# EAGLE board SparkFun_Si7021_Breakout_Panel_v10 (EAGLE 7.5.0), part 1 of 4
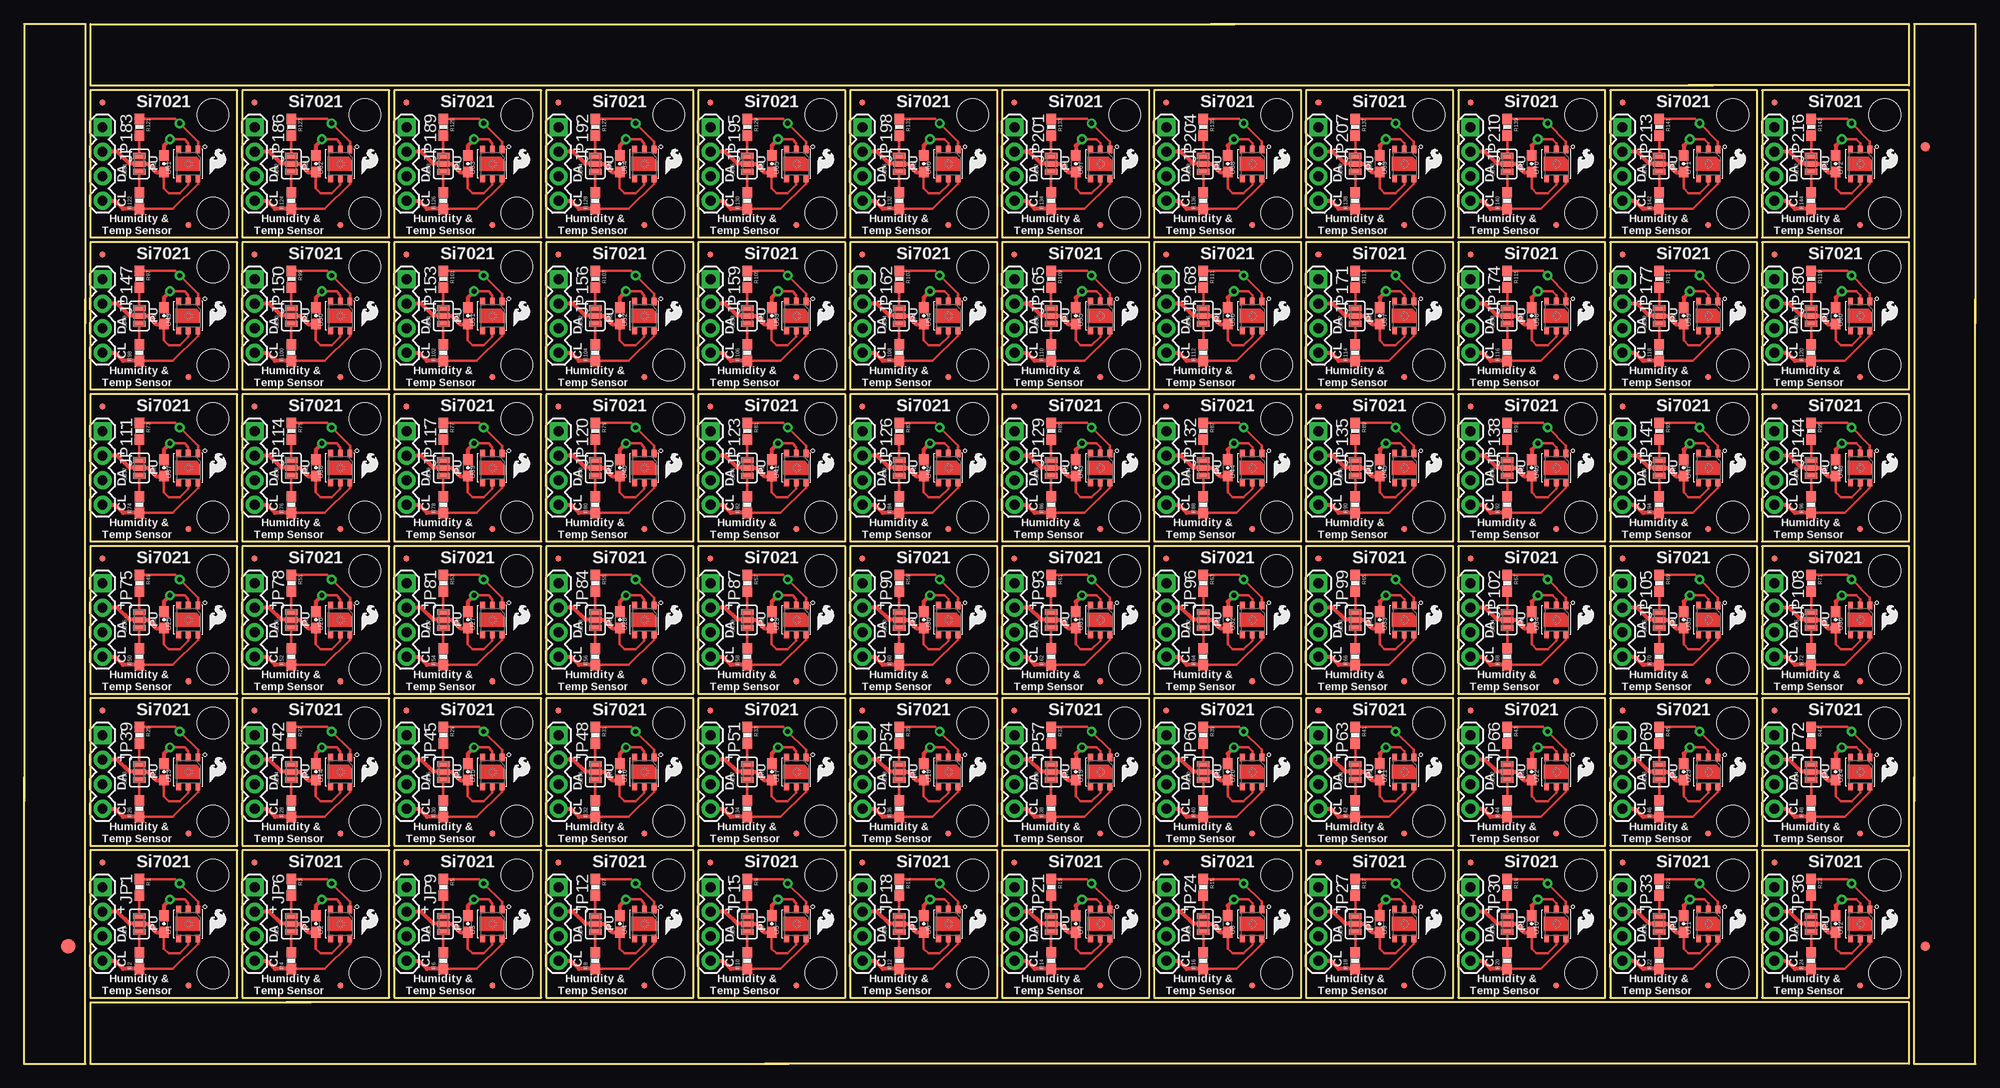
[diagram p0: board, top side]
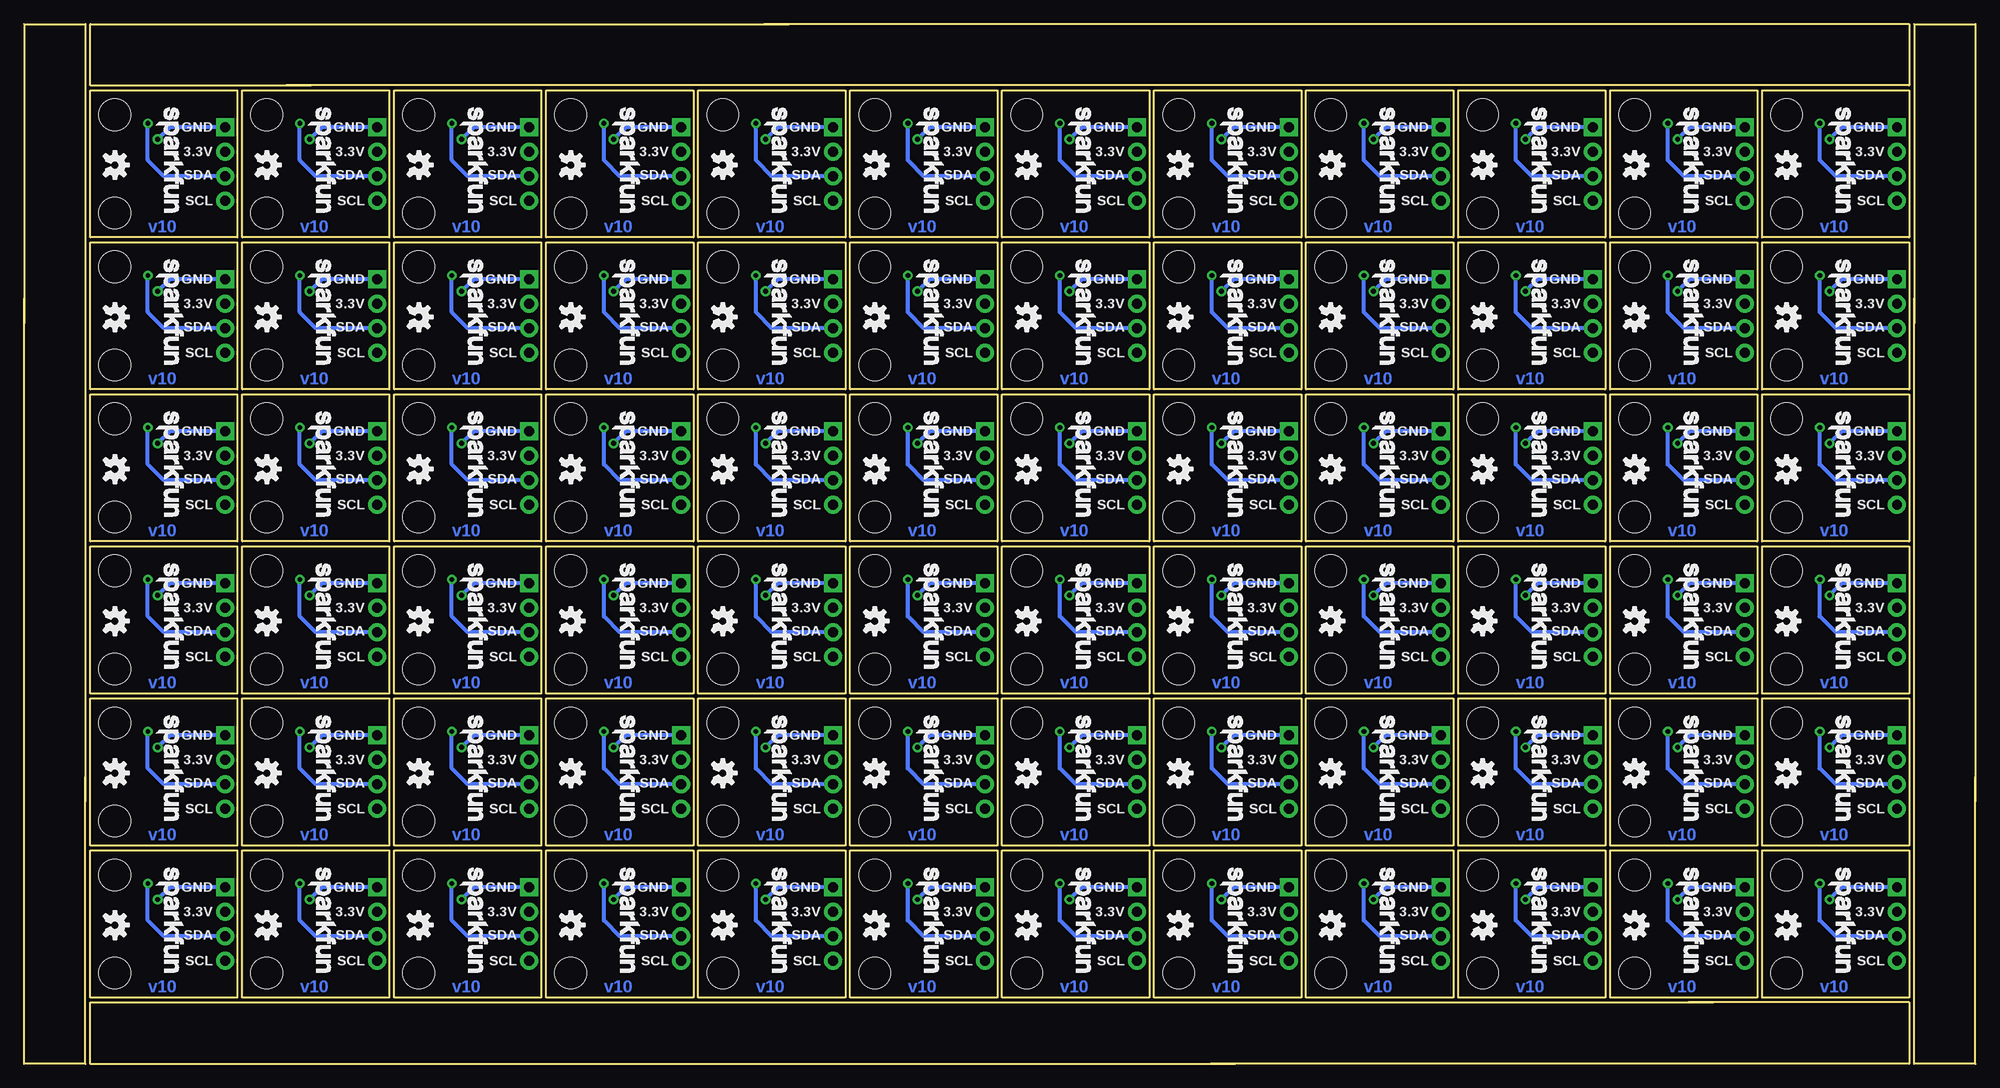
[diagram p1: board, bottom side, seen from below]

Size 202.18 x 107.7 mm. Coordinates in mm from the lower left corner, seen from the top.
Outline: 312 segments
Copper layers (1*16): Top 0.035mm / dielectric 1.5mm / Bottom 0.035mm
Design rules "SparkFun": minimum track width 8mil, minimum drill 20mil, track to track 8mil, track to pad 8mil, pad to pad 8mil, via to via 8mil, smd to smd 8mil, copper to edge 10mil, drill to drill 8mil, minimum pad ring 12mil, minimum via ring 10mil, stop-mask expansion 4mil, vias tented up to drill 25mil, thermal gap 10mil

## Footprints (pad centres in the part's own frame; a part is rotated, then mirrored left to right if it is on the bottom)
0603-CAP = smd 1.1 x 1: 1 -0.85,0; 2 0.85,0
FIDUCIAL-1.5X3 = smd 1.5 x 1.5: 1 0,0
FIDUCIAL-1X2 = smd 1 x 1: 1 0,0
1X04 = drill 1.016 pad 1.88 square: 1 0,0 | drill 1.016 pad 1.88: 2 2.54,0; 3 5.08,0; 4 7.62,0
MICRO-FIDUCIAL = smd 0.635 x 0.635: 1 0,0
0603-RES = smd 1.1 x 1: 1 -0.85,0; 2 0.85,0
SJ_3_PASTE1&2&3 = smd 0.635 x 1.27: 1 -0.813,0; 2 0,0; 3 0.813,0
STAND-OFF = hole 3.302: 0,0
SI7021 = smd 0.8 x 0.5: DATA 1.5,-1; GND 1.5,0; NC@3 1.5,1; NC@4 -1.5,1; SCK -1.5,-1; VDD -1.5,0

## Placement (x,y rotation side)
C1  0.1uF  [0603-CAP]  30.23,14.48 90 top
C2  0.1uF  [0603-CAP]  14.48,14.48 90 top
C3  0.1uF  [0603-CAP]  45.97,14.48 90 top
C4  0.1uF  [0603-CAP]  61.72,14.48 90 top
C5  0.1uF  [0603-CAP]  77.47,14.48 90 top
C6  0.1uF  [0603-CAP]  93.22,14.48 90 top
C7  0.1uF  [0603-CAP]  108.97,14.48 90 top
C8  0.1uF  [0603-CAP]  124.71,14.48 90 top
C9  0.1uF  [0603-CAP]  140.46,14.48 90 top
C10  0.1uF  [0603-CAP]  156.21,14.48 90 top
C11  0.1uF  [0603-CAP]  171.96,14.48 90 top
C12  0.1uF  [0603-CAP]  187.71,14.48 90 top
C13  0.1uF  [0603-CAP]  14.48,30.23 90 top
C14  0.1uF  [0603-CAP]  30.23,30.23 90 top
C15  0.1uF  [0603-CAP]  45.97,30.23 90 top
C16  0.1uF  [0603-CAP]  61.72,30.23 90 top
C17  0.1uF  [0603-CAP]  77.47,30.23 90 top
C18  0.1uF  [0603-CAP]  93.22,30.23 90 top
C19  0.1uF  [0603-CAP]  108.97,30.23 90 top
C20  0.1uF  [0603-CAP]  124.71,30.23 90 top
C21  0.1uF  [0603-CAP]  140.46,30.23 90 top
C22  0.1uF  [0603-CAP]  156.21,30.23 90 top
C23  0.1uF  [0603-CAP]  171.96,30.23 90 top
C24  0.1uF  [0603-CAP]  187.71,30.23 90 top
C25  0.1uF  [0603-CAP]  14.48,45.97 90 top
C26  0.1uF  [0603-CAP]  30.23,45.97 90 top
C27  0.1uF  [0603-CAP]  45.97,45.97 90 top
C28  0.1uF  [0603-CAP]  61.72,45.97 90 top
C29  0.1uF  [0603-CAP]  77.47,45.97 90 top
C30  0.1uF  [0603-CAP]  93.22,45.97 90 top
C31  0.1uF  [0603-CAP]  108.97,45.97 90 top
C32  0.1uF  [0603-CAP]  124.71,45.97 90 top
C33  0.1uF  [0603-CAP]  140.46,45.97 90 top
C34  0.1uF  [0603-CAP]  156.21,45.97 90 top
C35  0.1uF  [0603-CAP]  171.96,45.97 90 top
C36  0.1uF  [0603-CAP]  187.71,45.97 90 top
C37  0.1uF  [0603-CAP]  14.48,61.72 90 top
C38  0.1uF  [0603-CAP]  30.23,61.72 90 top
C39  0.1uF  [0603-CAP]  45.97,61.72 90 top
C40  0.1uF  [0603-CAP]  61.72,61.72 90 top
C41  0.1uF  [0603-CAP]  77.47,61.72 90 top
C42  0.1uF  [0603-CAP]  93.22,61.72 90 top
C43  0.1uF  [0603-CAP]  108.97,61.72 90 top
C44  0.1uF  [0603-CAP]  124.71,61.72 90 top
C45  0.1uF  [0603-CAP]  140.46,61.72 90 top
C46  0.1uF  [0603-CAP]  156.21,61.72 90 top
C47  0.1uF  [0603-CAP]  171.96,61.72 90 top
C48  0.1uF  [0603-CAP]  187.71,61.72 90 top
C49  0.1uF  [0603-CAP]  14.48,77.47 90 top
C50  0.1uF  [0603-CAP]  30.23,77.47 90 top
C51  0.1uF  [0603-CAP]  45.97,77.47 90 top
C52  0.1uF  [0603-CAP]  61.72,77.47 90 top
C53  0.1uF  [0603-CAP]  77.47,77.47 90 top
C54  0.1uF  [0603-CAP]  93.22,77.47 90 top
C55  0.1uF  [0603-CAP]  108.97,77.47 90 top
C56  0.1uF  [0603-CAP]  124.71,77.47 90 top
C57  0.1uF  [0603-CAP]  140.46,77.47 90 top
C58  0.1uF  [0603-CAP]  156.21,77.47 90 top
C59  0.1uF  [0603-CAP]  171.96,77.47 90 top
C60  0.1uF  [0603-CAP]  187.71,77.47 90 top
C61  0.1uF  [0603-CAP]  14.48,93.22 90 top
C62  0.1uF  [0603-CAP]  30.23,93.22 90 top
C63  0.1uF  [0603-CAP]  45.97,93.22 90 top
C64  0.1uF  [0603-CAP]  61.72,93.22 90 top
C65  0.1uF  [0603-CAP]  77.47,93.22 90 top
C66  0.1uF  [0603-CAP]  93.22,93.22 90 top
C67  0.1uF  [0603-CAP]  108.97,93.22 90 top
C68  0.1uF  [0603-CAP]  124.71,93.22 90 top
C69  0.1uF  [0603-CAP]  140.46,93.22 90 top
C70  0.1uF  [0603-CAP]  156.21,93.22 90 top
C71  0.1uF  [0603-CAP]  171.96,93.22 90 top
C72  0.1uF  [0603-CAP]  187.71,93.22 90 top
E$1  [FIDUCIAL-1.5X3]  4.57,12.19 0 top
E$5  [FIDUCIAL-1X2]  196.98,12.19 0 top
E$6  [FIDUCIAL-1X2]  196.98,95 180 top
JP1  [1X04]  8.13,18.29 270 top
JP2  FIDUCIALUFIDUCIAL  [MICRO-FIDUCIAL]  32.77,8.13 90 top
JP3  FIDUCIALUFIDUCIAL  [MICRO-FIDUCIAL]  17.02,8.13 90 top
JP4  FIDUCIALUFIDUCIAL  [MICRO-FIDUCIAL]  8.13,20.83 90 top
JP5  FIDUCIALUFIDUCIAL  [MICRO-FIDUCIAL]  23.88,20.83 90 top
JP6  [1X04]  23.88,18.29 270 top
JP7  FIDUCIALUFIDUCIAL  [MICRO-FIDUCIAL]  48.51,8.13 90 top
JP8  FIDUCIALUFIDUCIAL  [MICRO-FIDUCIAL]  39.62,20.83 90 top
JP9  [1X04]  39.62,18.29 270 top
JP10  FIDUCIALUFIDUCIAL  [MICRO-FIDUCIAL]  64.26,8.13 90 top
JP11  FIDUCIALUFIDUCIAL  [MICRO-FIDUCIAL]  55.37,20.83 90 top
JP12  [1X04]  55.37,18.29 270 top
JP13  FIDUCIALUFIDUCIAL  [MICRO-FIDUCIAL]  80.01,8.13 90 top
JP14  FIDUCIALUFIDUCIAL  [MICRO-FIDUCIAL]  71.12,20.83 90 top
JP15  [1X04]  71.12,18.29 270 top
JP16  FIDUCIALUFIDUCIAL  [MICRO-FIDUCIAL]  95.76,8.13 90 top
JP17  FIDUCIALUFIDUCIAL  [MICRO-FIDUCIAL]  86.87,20.83 90 top
JP18  [1X04]  86.87,18.29 270 top
JP19  FIDUCIALUFIDUCIAL  [MICRO-FIDUCIAL]  111.51,8.13 90 top
JP20  FIDUCIALUFIDUCIAL  [MICRO-FIDUCIAL]  102.62,20.83 90 top
JP21  [1X04]  102.62,18.29 270 top
JP22  FIDUCIALUFIDUCIAL  [MICRO-FIDUCIAL]  127.25,8.13 90 top
JP23  FIDUCIALUFIDUCIAL  [MICRO-FIDUCIAL]  118.36,20.83 90 top
JP24  [1X04]  118.36,18.29 270 top
JP25  FIDUCIALUFIDUCIAL  [MICRO-FIDUCIAL]  143,8.13 90 top
JP26  FIDUCIALUFIDUCIAL  [MICRO-FIDUCIAL]  134.11,20.83 90 top
JP27  [1X04]  134.11,18.29 270 top
JP28  FIDUCIALUFIDUCIAL  [MICRO-FIDUCIAL]  158.75,8.13 90 top
JP29  FIDUCIALUFIDUCIAL  [MICRO-FIDUCIAL]  149.86,20.83 90 top
JP30  [1X04]  149.86,18.29 270 top
JP31  FIDUCIALUFIDUCIAL  [MICRO-FIDUCIAL]  174.5,8.13 90 top
JP32  FIDUCIALUFIDUCIAL  [MICRO-FIDUCIAL]  165.61,20.83 90 top
JP33  [1X04]  165.61,18.29 270 top
JP34  FIDUCIALUFIDUCIAL  [MICRO-FIDUCIAL]  190.25,8.13 90 top
JP35  FIDUCIALUFIDUCIAL  [MICRO-FIDUCIAL]  181.36,20.83 90 top
JP36  [1X04]  181.36,18.29 270 top
JP37  FIDUCIALUFIDUCIAL  [MICRO-FIDUCIAL]  17.02,23.88 90 top
JP38  FIDUCIALUFIDUCIAL  [MICRO-FIDUCIAL]  8.13,36.58 90 top
JP39  [1X04]  8.13,34.04 270 top
JP40  FIDUCIALUFIDUCIAL  [MICRO-FIDUCIAL]  32.77,23.88 90 top
JP41  FIDUCIALUFIDUCIAL  [MICRO-FIDUCIAL]  23.88,36.58 90 top
JP42  [1X04]  23.88,34.04 270 top
JP43  FIDUCIALUFIDUCIAL  [MICRO-FIDUCIAL]  48.51,23.88 90 top
JP44  FIDUCIALUFIDUCIAL  [MICRO-FIDUCIAL]  39.62,36.58 90 top
JP45  [1X04]  39.62,34.04 270 top
JP46  FIDUCIALUFIDUCIAL  [MICRO-FIDUCIAL]  64.26,23.88 90 top
JP47  FIDUCIALUFIDUCIAL  [MICRO-FIDUCIAL]  55.37,36.58 90 top
JP48  [1X04]  55.37,34.04 270 top
JP49  FIDUCIALUFIDUCIAL  [MICRO-FIDUCIAL]  80.01,23.88 90 top
JP50  FIDUCIALUFIDUCIAL  [MICRO-FIDUCIAL]  71.12,36.58 90 top
JP51  [1X04]  71.12,34.04 270 top
JP52  FIDUCIALUFIDUCIAL  [MICRO-FIDUCIAL]  95.76,23.88 90 top
JP53  FIDUCIALUFIDUCIAL  [MICRO-FIDUCIAL]  86.87,36.58 90 top
JP54  [1X04]  86.87,34.04 270 top
JP55  FIDUCIALUFIDUCIAL  [MICRO-FIDUCIAL]  111.51,23.88 90 top
JP56  FIDUCIALUFIDUCIAL  [MICRO-FIDUCIAL]  102.62,36.58 90 top
JP57  [1X04]  102.62,34.04 270 top
JP58  FIDUCIALUFIDUCIAL  [MICRO-FIDUCIAL]  127.25,23.88 90 top
JP59  FIDUCIALUFIDUCIAL  [MICRO-FIDUCIAL]  118.36,36.58 90 top
JP60  [1X04]  118.36,34.04 270 top
JP61  FIDUCIALUFIDUCIAL  [MICRO-FIDUCIAL]  143,23.88 90 top
JP62  FIDUCIALUFIDUCIAL  [MICRO-FIDUCIAL]  134.11,36.58 90 top
JP63  [1X04]  134.11,34.04 270 top
JP64  FIDUCIALUFIDUCIAL  [MICRO-FIDUCIAL]  158.75,23.88 90 top
JP65  FIDUCIALUFIDUCIAL  [MICRO-FIDUCIAL]  149.86,36.58 90 top
JP66  [1X04]  149.86,34.04 270 top
JP67  FIDUCIALUFIDUCIAL  [MICRO-FIDUCIAL]  174.5,23.88 90 top
JP68  FIDUCIALUFIDUCIAL  [MICRO-FIDUCIAL]  165.61,36.58 90 top
JP69  [1X04]  165.61,34.04 270 top
JP70  FIDUCIALUFIDUCIAL  [MICRO-FIDUCIAL]  190.25,23.88 90 top
JP71  FIDUCIALUFIDUCIAL  [MICRO-FIDUCIAL]  181.36,36.58 90 top
JP72  [1X04]  181.36,34.04 270 top
JP73  FIDUCIALUFIDUCIAL  [MICRO-FIDUCIAL]  17.02,39.62 90 top
JP74  FIDUCIALUFIDUCIAL  [MICRO-FIDUCIAL]  8.13,52.32 90 top
JP75  [1X04]  8.13,49.78 270 top
JP76  FIDUCIALUFIDUCIAL  [MICRO-FIDUCIAL]  32.77,39.62 90 top
JP77  FIDUCIALUFIDUCIAL  [MICRO-FIDUCIAL]  23.88,52.32 90 top
JP78  [1X04]  23.88,49.78 270 top
JP79  FIDUCIALUFIDUCIAL  [MICRO-FIDUCIAL]  48.51,39.62 90 top
JP80  FIDUCIALUFIDUCIAL  [MICRO-FIDUCIAL]  39.62,52.32 90 top
JP81  [1X04]  39.62,49.78 270 top
JP82  FIDUCIALUFIDUCIAL  [MICRO-FIDUCIAL]  64.26,39.62 90 top
JP83  FIDUCIALUFIDUCIAL  [MICRO-FIDUCIAL]  55.37,52.32 90 top
JP84  [1X04]  55.37,49.78 270 top
JP85  FIDUCIALUFIDUCIAL  [MICRO-FIDUCIAL]  80.01,39.62 90 top
JP86  FIDUCIALUFIDUCIAL  [MICRO-FIDUCIAL]  71.12,52.32 90 top
JP87  [1X04]  71.12,49.78 270 top
JP88  FIDUCIALUFIDUCIAL  [MICRO-FIDUCIAL]  95.76,39.62 90 top
JP89  FIDUCIALUFIDUCIAL  [MICRO-FIDUCIAL]  86.87,52.32 90 top
JP90  [1X04]  86.87,49.78 270 top
JP91  FIDUCIALUFIDUCIAL  [MICRO-FIDUCIAL]  111.51,39.62 90 top
JP92  FIDUCIALUFIDUCIAL  [MICRO-FIDUCIAL]  102.62,52.32 90 top
JP93  [1X04]  102.62,49.78 270 top
JP94  FIDUCIALUFIDUCIAL  [MICRO-FIDUCIAL]  127.25,39.62 90 top
JP95  FIDUCIALUFIDUCIAL  [MICRO-FIDUCIAL]  118.36,52.32 90 top
JP96  [1X04]  118.36,49.78 270 top
JP97  FIDUCIALUFIDUCIAL  [MICRO-FIDUCIAL]  143,39.62 90 top
JP98  FIDUCIALUFIDUCIAL  [MICRO-FIDUCIAL]  134.11,52.32 90 top
JP99  [1X04]  134.11,49.78 270 top
JP100  FIDUCIALUFIDUCIAL  [MICRO-FIDUCIAL]  158.75,39.62 90 top
JP101  FIDUCIALUFIDUCIAL  [MICRO-FIDUCIAL]  149.86,52.32 90 top
JP102  [1X04]  149.86,49.78 270 top
JP103  FIDUCIALUFIDUCIAL  [MICRO-FIDUCIAL]  174.5,39.62 90 top
JP104  FIDUCIALUFIDUCIAL  [MICRO-FIDUCIAL]  165.61,52.32 90 top
JP105  [1X04]  165.61,49.78 270 top
JP106  FIDUCIALUFIDUCIAL  [MICRO-FIDUCIAL]  190.25,39.62 90 top
JP107  FIDUCIALUFIDUCIAL  [MICRO-FIDUCIAL]  181.36,52.32 90 top
JP108  [1X04]  181.36,49.78 270 top
JP109  FIDUCIALUFIDUCIAL  [MICRO-FIDUCIAL]  17.02,55.37 90 top
JP110  FIDUCIALUFIDUCIAL  [MICRO-FIDUCIAL]  8.13,68.07 90 top
JP111  [1X04]  8.13,65.53 270 top
JP112  FIDUCIALUFIDUCIAL  [MICRO-FIDUCIAL]  32.77,55.37 90 top
JP113  FIDUCIALUFIDUCIAL  [MICRO-FIDUCIAL]  23.88,68.07 90 top
JP114  [1X04]  23.88,65.53 270 top
JP115  FIDUCIALUFIDUCIAL  [MICRO-FIDUCIAL]  48.51,55.37 90 top
JP116  FIDUCIALUFIDUCIAL  [MICRO-FIDUCIAL]  39.62,68.07 90 top
JP117  [1X04]  39.62,65.53 270 top
JP118  FIDUCIALUFIDUCIAL  [MICRO-FIDUCIAL]  64.26,55.37 90 top
JP119  FIDUCIALUFIDUCIAL  [MICRO-FIDUCIAL]  55.37,68.07 90 top
JP120  [1X04]  55.37,65.53 270 top
JP121  FIDUCIALUFIDUCIAL  [MICRO-FIDUCIAL]  80.01,55.37 90 top
JP122  FIDUCIALUFIDUCIAL  [MICRO-FIDUCIAL]  71.12,68.07 90 top
JP123  [1X04]  71.12,65.53 270 top
JP124  FIDUCIALUFIDUCIAL  [MICRO-FIDUCIAL]  95.76,55.37 90 top
JP125  FIDUCIALUFIDUCIAL  [MICRO-FIDUCIAL]  86.87,68.07 90 top
JP126  [1X04]  86.87,65.53 270 top
JP127  FIDUCIALUFIDUCIAL  [MICRO-FIDUCIAL]  111.51,55.37 90 top
JP128  FIDUCIALUFIDUCIAL  [MICRO-FIDUCIAL]  102.62,68.07 90 top
JP129  [1X04]  102.62,65.53 270 top
JP130  FIDUCIALUFIDUCIAL  [MICRO-FIDUCIAL]  127.25,55.37 90 top
JP131  FIDUCIALUFIDUCIAL  [MICRO-FIDUCIAL]  118.36,68.07 90 top
JP132  [1X04]  118.36,65.53 270 top
JP133  FIDUCIALUFIDUCIAL  [MICRO-FIDUCIAL]  143,55.37 90 top
JP134  FIDUCIALUFIDUCIAL  [MICRO-FIDUCIAL]  134.11,68.07 90 top
JP135  [1X04]  134.11,65.53 270 top
JP136  FIDUCIALUFIDUCIAL  [MICRO-FIDUCIAL]  158.75,55.37 90 top
JP137  FIDUCIALUFIDUCIAL  [MICRO-FIDUCIAL]  149.86,68.07 90 top
JP138  [1X04]  149.86,65.53 270 top
JP139  FIDUCIALUFIDUCIAL  [MICRO-FIDUCIAL]  174.5,55.37 90 top
JP140  FIDUCIALUFIDUCIAL  [MICRO-FIDUCIAL]  165.61,68.07 90 top
JP141  [1X04]  165.61,65.53 270 top
JP142  FIDUCIALUFIDUCIAL  [MICRO-FIDUCIAL]  190.25,55.37 90 top
JP143  FIDUCIALUFIDUCIAL  [MICRO-FIDUCIAL]  181.36,68.07 90 top
JP144  [1X04]  181.36,65.53 270 top
JP145  FIDUCIALUFIDUCIAL  [MICRO-FIDUCIAL]  17.02,71.12 90 top
JP146  FIDUCIALUFIDUCIAL  [MICRO-FIDUCIAL]  8.13,83.82 90 top
JP147  [1X04]  8.13,81.28 270 top
JP148  FIDUCIALUFIDUCIAL  [MICRO-FIDUCIAL]  32.77,71.12 90 top
JP149  FIDUCIALUFIDUCIAL  [MICRO-FIDUCIAL]  23.88,83.82 90 top
JP150  [1X04]  23.88,81.28 270 top
JP151  FIDUCIALUFIDUCIAL  [MICRO-FIDUCIAL]  48.51,71.12 90 top
JP152  FIDUCIALUFIDUCIAL  [MICRO-FIDUCIAL]  39.62,83.82 90 top
JP153  [1X04]  39.62,81.28 270 top
JP154  FIDUCIALUFIDUCIAL  [MICRO-FIDUCIAL]  64.26,71.12 90 top
JP155  FIDUCIALUFIDUCIAL  [MICRO-FIDUCIAL]  55.37,83.82 90 top
JP156  [1X04]  55.37,81.28 270 top
JP157  FIDUCIALUFIDUCIAL  [MICRO-FIDUCIAL]  80.01,71.12 90 top
JP158  FIDUCIALUFIDUCIAL  [MICRO-FIDUCIAL]  71.12,83.82 90 top
JP159  [1X04]  71.12,81.28 270 top
JP160  FIDUCIALUFIDUCIAL  [MICRO-FIDUCIAL]  95.76,71.12 90 top
JP161  FIDUCIALUFIDUCIAL  [MICRO-FIDUCIAL]  86.87,83.82 90 top
JP162  [1X04]  86.87,81.28 270 top
JP163  FIDUCIALUFIDUCIAL  [MICRO-FIDUCIAL]  111.51,71.12 90 top
JP164  FIDUCIALUFIDUCIAL  [MICRO-FIDUCIAL]  102.62,83.82 90 top
JP165  [1X04]  102.62,81.28 270 top
JP166  FIDUCIALUFIDUCIAL  [MICRO-FIDUCIAL]  127.25,71.12 90 top
JP167  FIDUCIALUFIDUCIAL  [MICRO-FIDUCIAL]  118.36,83.82 90 top
JP168  [1X04]  118.36,81.28 270 top
JP169  FIDUCIALUFIDUCIAL  [MICRO-FIDUCIAL]  143,71.12 90 top
JP170  FIDUCIALUFIDUCIAL  [MICRO-FIDUCIAL]  134.11,83.82 90 top
JP171  [1X04]  134.11,81.28 270 top
JP172  FIDUCIALUFIDUCIAL  [MICRO-FIDUCIAL]  158.75,71.12 90 top
JP173  FIDUCIALUFIDUCIAL  [MICRO-FIDUCIAL]  149.86,83.82 90 top
JP174  [1X04]  149.86,81.28 270 top
JP175  FIDUCIALUFIDUCIAL  [MICRO-FIDUCIAL]  174.5,71.12 90 top
JP176  FIDUCIALUFIDUCIAL  [MICRO-FIDUCIAL]  165.61,83.82 90 top
JP177  [1X04]  165.61,81.28 270 top
JP178  FIDUCIALUFIDUCIAL  [MICRO-FIDUCIAL]  190.25,71.12 90 top
JP179  FIDUCIALUFIDUCIAL  [MICRO-FIDUCIAL]  181.36,83.82 90 top
JP180  [1X04]  181.36,81.28 270 top
JP181  FIDUCIALUFIDUCIAL  [MICRO-FIDUCIAL]  17.02,86.87 90 top
JP182  FIDUCIALUFIDUCIAL  [MICRO-FIDUCIAL]  8.13,99.57 90 top
JP183  [1X04]  8.13,97.03 270 top
JP184  FIDUCIALUFIDUCIAL  [MICRO-FIDUCIAL]  32.77,86.87 90 top
JP185  FIDUCIALUFIDUCIAL  [MICRO-FIDUCIAL]  23.88,99.57 90 top
JP186  [1X04]  23.88,97.03 270 top
JP187  FIDUCIALUFIDUCIAL  [MICRO-FIDUCIAL]  48.51,86.87 90 top
JP188  FIDUCIALUFIDUCIAL  [MICRO-FIDUCIAL]  39.62,99.57 90 top
JP189  [1X04]  39.62,97.03 270 top
JP190  FIDUCIALUFIDUCIAL  [MICRO-FIDUCIAL]  64.26,86.87 90 top
JP191  FIDUCIALUFIDUCIAL  [MICRO-FIDUCIAL]  55.37,99.57 90 top
JP192  [1X04]  55.37,97.03 270 top
JP193  FIDUCIALUFIDUCIAL  [MICRO-FIDUCIAL]  80.01,86.87 90 top
JP194  FIDUCIALUFIDUCIAL  [MICRO-FIDUCIAL]  71.12,99.57 90 top
JP195  [1X04]  71.12,97.03 270 top
JP196  FIDUCIALUFIDUCIAL  [MICRO-FIDUCIAL]  95.76,86.87 90 top
JP197  FIDUCIALUFIDUCIAL  [MICRO-FIDUCIAL]  86.87,99.57 90 top
JP198  [1X04]  86.87,97.03 270 top
JP199  FIDUCIALUFIDUCIAL  [MICRO-FIDUCIAL]  111.51,86.87 90 top
JP200  FIDUCIALUFIDUCIAL  [MICRO-FIDUCIAL]  102.62,99.57 90 top
JP201  [1X04]  102.62,97.03 270 top
JP202  FIDUCIALUFIDUCIAL  [MICRO-FIDUCIAL]  127.25,86.87 90 top
JP203  FIDUCIALUFIDUCIAL  [MICRO-FIDUCIAL]  118.36,99.57 90 top
JP204  [1X04]  118.36,97.03 270 top
JP205  FIDUCIALUFIDUCIAL  [MICRO-FIDUCIAL]  143,86.87 90 top
JP206  FIDUCIALUFIDUCIAL  [MICRO-FIDUCIAL]  134.11,99.57 90 top
JP207  [1X04]  134.11,97.03 270 top
JP208  FIDUCIALUFIDUCIAL  [MICRO-FIDUCIAL]  158.75,86.87 90 top
JP209  FIDUCIALUFIDUCIAL  [MICRO-FIDUCIAL]  149.86,99.57 90 top
JP210  [1X04]  149.86,97.03 270 top
JP211  FIDUCIALUFIDUCIAL  [MICRO-FIDUCIAL]  174.5,86.87 90 top
JP212  FIDUCIALUFIDUCIAL  [MICRO-FIDUCIAL]  165.61,99.57 90 top
JP213  [1X04]  165.61,97.03 270 top
JP214  FIDUCIALUFIDUCIAL  [MICRO-FIDUCIAL]  190.25,86.87 90 top
JP215  FIDUCIALUFIDUCIAL  [MICRO-FIDUCIAL]  181.36,99.57 90 top
JP216  [1X04]  181.36,97.03 270 top
LOGO1  OSHW-LOGOS  [OSHW-LOGO-S]  35.31,14.35 270 bottom
LOGO2  OSHW-LOGOS  [OSHW-LOGO-S]  19.56,14.35 270 bottom
LOGO3  SFE_LOGO_FLAME.1_INCH  [SFE_LOGO_FLAME_.1]  18.92,13.08 0 top
LOGO4  SFE_LOGO_NAME.1_INCH  [SFE_LOGO_NAME_.1]  15.75,20.83 270 bottom
LOGO5  SFE_LOGO_FLAME.1_INCH  [SFE_LOGO_FLAME_.1]  34.67,13.08 0 top
LOGO6  SFE_LOGO_NAME.1_INCH  [SFE_LOGO_NAME_.1]  31.5,20.83 270 bottom
LOGO7  OSHW-LOGOS  [OSHW-LOGO-S]  51.05,14.35 270 bottom
LOGO8  SFE_LOGO_FLAME.1_INCH  [SFE_LOGO_FLAME_.1]  50.42,13.08 0 top
LOGO9  SFE_LOGO_NAME.1_INCH  [SFE_LOGO_NAME_.1]  47.24,20.83 270 bottom
LOGO10  OSHW-LOGOS  [OSHW-LOGO-S]  66.8,14.35 270 bottom
LOGO11  SFE_LOGO_FLAME.1_INCH  [SFE_LOGO_FLAME_.1]  66.17,13.08 0 top
LOGO12  SFE_LOGO_NAME.1_INCH  [SFE_LOGO_NAME_.1]  62.99,20.83 270 bottom
LOGO13  OSHW-LOGOS  [OSHW-LOGO-S]  82.55,14.35 270 bottom
LOGO14  SFE_LOGO_FLAME.1_INCH  [SFE_LOGO_FLAME_.1]  81.92,13.08 0 top
LOGO15  SFE_LOGO_NAME.1_INCH  [SFE_LOGO_NAME_.1]  78.74,20.83 270 bottom
LOGO16  OSHW-LOGOS  [OSHW-LOGO-S]  98.3,14.35 270 bottom
LOGO17  SFE_LOGO_FLAME.1_INCH  [SFE_LOGO_FLAME_.1]  97.66,13.08 0 top
LOGO18  SFE_LOGO_NAME.1_INCH  [SFE_LOGO_NAME_.1]  94.49,20.83 270 bottom
LOGO19  OSHW-LOGOS  [OSHW-LOGO-S]  114.05,14.35 270 bottom
LOGO20  SFE_LOGO_FLAME.1_INCH  [SFE_LOGO_FLAME_.1]  113.41,13.08 0 top
LOGO21  SFE_LOGO_NAME.1_INCH  [SFE_LOGO_NAME_.1]  110.24,20.83 270 bottom
LOGO22  OSHW-LOGOS  [OSHW-LOGO-S]  129.79,14.35 270 bottom
LOGO23  SFE_LOGO_FLAME.1_INCH  [SFE_LOGO_FLAME_.1]  129.16,13.08 0 top
LOGO24  SFE_LOGO_NAME.1_INCH  [SFE_LOGO_NAME_.1]  125.98,20.83 270 bottom
LOGO25  OSHW-LOGOS  [OSHW-LOGO-S]  145.54,14.35 270 bottom
LOGO26  SFE_LOGO_FLAME.1_INCH  [SFE_LOGO_FLAME_.1]  144.91,13.08 0 top
LOGO27  SFE_LOGO_NAME.1_INCH  [SFE_LOGO_NAME_.1]  141.73,20.83 270 bottom
LOGO28  OSHW-LOGOS  [OSHW-LOGO-S]  161.29,14.35 270 bottom
LOGO29  SFE_LOGO_FLAME.1_INCH  [SFE_LOGO_FLAME_.1]  160.66,13.08 0 top
LOGO30  SFE_LOGO_NAME.1_INCH  [SFE_LOGO_NAME_.1]  157.48,20.83 270 bottom
LOGO31  OSHW-LOGOS  [OSHW-LOGO-S]  177.04,14.35 270 bottom
LOGO32  SFE_LOGO_FLAME.1_INCH  [SFE_LOGO_FLAME_.1]  176.4,13.08 0 top
LOGO33  SFE_LOGO_NAME.1_INCH  [SFE_LOGO_NAME_.1]  173.23,20.83 270 bottom
LOGO34  OSHW-LOGOS  [OSHW-LOGO-S]  192.79,14.35 270 bottom
LOGO35  SFE_LOGO_FLAME.1_INCH  [SFE_LOGO_FLAME_.1]  192.15,13.08 0 top
LOGO36  SFE_LOGO_NAME.1_INCH  [SFE_LOGO_NAME_.1]  188.98,20.83 270 bottom
LOGO37  OSHW-LOGOS  [OSHW-LOGO-S]  19.56,30.1 270 bottom
LOGO38  SFE_LOGO_FLAME.1_INCH  [SFE_LOGO_FLAME_.1]  18.92,28.83 0 top
LOGO39  SFE_LOGO_NAME.1_INCH  [SFE_LOGO_NAME_.1]  15.75,36.58 270 bottom
LOGO40  OSHW-LOGOS  [OSHW-LOGO-S]  35.31,30.1 270 bottom
LOGO41  SFE_LOGO_FLAME.1_INCH  [SFE_LOGO_FLAME_.1]  34.67,28.83 0 top
LOGO42  SFE_LOGO_NAME.1_INCH  [SFE_LOGO_NAME_.1]  31.5,36.58 270 bottom
LOGO43  OSHW-LOGOS  [OSHW-LOGO-S]  51.05,30.1 270 bottom
LOGO44  SFE_LOGO_FLAME.1_INCH  [SFE_LOGO_FLAME_.1]  50.42,28.83 0 top
LOGO45  SFE_LOGO_NAME.1_INCH  [SFE_LOGO_NAME_.1]  47.24,36.58 270 bottom
LOGO46  OSHW-LOGOS  [OSHW-LOGO-S]  66.8,30.1 270 bottom
LOGO47  SFE_LOGO_FLAME.1_INCH  [SFE_LOGO_FLAME_.1]  66.17,28.83 0 top
LOGO48  SFE_LOGO_NAME.1_INCH  [SFE_LOGO_NAME_.1]  62.99,36.58 270 bottom
LOGO49  OSHW-LOGOS  [OSHW-LOGO-S]  82.55,30.1 270 bottom
LOGO50  SFE_LOGO_FLAME.1_INCH  [SFE_LOGO_FLAME_.1]  81.92,28.83 0 top
LOGO51  SFE_LOGO_NAME.1_INCH  [SFE_LOGO_NAME_.1]  78.74,36.58 270 bottom
LOGO52  OSHW-LOGOS  [OSHW-LOGO-S]  98.3,30.1 270 bottom
LOGO53  SFE_LOGO_FLAME.1_INCH  [SFE_LOGO_FLAME_.1]  97.66,28.83 0 top
LOGO54  SFE_LOGO_NAME.1_INCH  [SFE_LOGO_NAME_.1]  94.49,36.58 270 bottom
LOGO55  OSHW-LOGOS  [OSHW-LOGO-S]  114.05,30.1 270 bottom
LOGO56  SFE_LOGO_FLAME.1_INCH  [SFE_LOGO_FLAME_.1]  113.41,28.83 0 top
LOGO57  SFE_LOGO_NAME.1_INCH  [SFE_LOGO_NAME_.1]  110.24,36.58 270 bottom
LOGO58  OSHW-LOGOS  [OSHW-LOGO-S]  129.79,30.1 270 bottom
LOGO59  SFE_LOGO_FLAME.1_INCH  [SFE_LOGO_FLAME_.1]  129.16,28.83 0 top
LOGO60  SFE_LOGO_NAME.1_INCH  [SFE_LOGO_NAME_.1]  125.98,36.58 270 bottom
LOGO61  OSHW-LOGOS  [OSHW-LOGO-S]  145.54,30.1 270 bottom
LOGO62  SFE_LOGO_FLAME.1_INCH  [SFE_LOGO_FLAME_.1]  144.91,28.83 0 top
LOGO63  SFE_LOGO_NAME.1_INCH  [SFE_LOGO_NAME_.1]  141.73,36.58 270 bottom
LOGO64  OSHW-LOGOS  [OSHW-LOGO-S]  161.29,30.1 270 bottom
LOGO65  SFE_LOGO_FLAME.1_INCH  [SFE_LOGO_FLAME_.1]  160.66,28.83 0 top
LOGO66  SFE_LOGO_NAME.1_INCH  [SFE_LOGO_NAME_.1]  157.48,36.58 270 bottom
LOGO67  OSHW-LOGOS  [OSHW-LOGO-S]  177.04,30.1 270 bottom
LOGO68  SFE_LOGO_FLAME.1_INCH  [SFE_LOGO_FLAME_.1]  176.4,28.83 0 top
LOGO69  SFE_LOGO_NAME.1_INCH  [SFE_LOGO_NAME_.1]  173.23,36.58 270 bottom
LOGO70  OSHW-LOGOS  [OSHW-LOGO-S]  192.79,30.1 270 bottom
LOGO71  SFE_LOGO_FLAME.1_INCH  [SFE_LOGO_FLAME_.1]  192.15,28.83 0 top
LOGO72  SFE_LOGO_NAME.1_INCH  [SFE_LOGO_NAME_.1]  188.98,36.58 270 bottom
LOGO73  OSHW-LOGOS  [OSHW-LOGO-S]  19.56,45.85 270 bottom
LOGO74  SFE_LOGO_FLAME.1_INCH  [SFE_LOGO_FLAME_.1]  18.92,44.58 0 top
LOGO75  SFE_LOGO_NAME.1_INCH  [SFE_LOGO_NAME_.1]  15.75,52.32 270 bottom
LOGO76  OSHW-LOGOS  [OSHW-LOGO-S]  35.31,45.85 270 bottom
LOGO77  SFE_LOGO_FLAME.1_INCH  [SFE_LOGO_FLAME_.1]  34.67,44.58 0 top
LOGO78  SFE_LOGO_NAME.1_INCH  [SFE_LOGO_NAME_.1]  31.5,52.32 270 bottom
LOGO79  OSHW-LOGOS  [OSHW-LOGO-S]  51.05,45.85 270 bottom
LOGO80  SFE_LOGO_FLAME.1_INCH  [SFE_LOGO_FLAME_.1]  50.42,44.58 0 top
LOGO81  SFE_LOGO_NAME.1_INCH  [SFE_LOGO_NAME_.1]  47.24,52.32 270 bottom
LOGO82  OSHW-LOGOS  [OSHW-LOGO-S]  66.8,45.85 270 bottom
LOGO83  SFE_LOGO_FLAME.1_INCH  [SFE_LOGO_FLAME_.1]  66.17,44.58 0 top
LOGO84  SFE_LOGO_NAME.1_INCH  [SFE_LOGO_NAME_.1]  62.99,52.32 270 bottom
LOGO85  OSHW-LOGOS  [OSHW-LOGO-S]  82.55,45.85 270 bottom
LOGO86  SFE_LOGO_FLAME.1_INCH  [SFE_LOGO_FLAME_.1]  81.92,44.58 0 top
LOGO87  SFE_LOGO_NAME.1_INCH  [SFE_LOGO_NAME_.1]  78.74,52.32 270 bottom
LOGO88  OSHW-LOGOS  [OSHW-LOGO-S]  98.3,45.85 270 bottom
LOGO89  SFE_LOGO_FLAME.1_INCH  [SFE_LOGO_FLAME_.1]  97.66,44.58 0 top
LOGO90  SFE_LOGO_NAME.1_INCH  [SFE_LOGO_NAME_.1]  94.49,52.32 270 bottom
LOGO91  OSHW-LOGOS  [OSHW-LOGO-S]  114.05,45.85 270 bottom
LOGO92  SFE_LOGO_FLAME.1_INCH  [SFE_LOGO_FLAME_.1]  113.41,44.58 0 top
LOGO93  SFE_LOGO_NAME.1_INCH  [SFE_LOGO_NAME_.1]  110.24,52.32 270 bottom
LOGO94  OSHW-LOGOS  [OSHW-LOGO-S]  129.79,45.85 270 bottom
LOGO95  SFE_LOGO_FLAME.1_INCH  [SFE_LOGO_FLAME_.1]  129.16,44.58 0 top
LOGO96  SFE_LOGO_NAME.1_INCH  [SFE_LOGO_NAME_.1]  125.98,52.32 270 bottom
LOGO97  OSHW-LOGOS  [OSHW-LOGO-S]  145.54,45.85 270 bottom
LOGO98  SFE_LOGO_FLAME.1_INCH  [SFE_LOGO_FLAME_.1]  144.91,44.58 0 top
LOGO99  SFE_LOGO_NAME.1_INCH  [SFE_LOGO_NAME_.1]  141.73,52.32 270 bottom
LOGO100  OSHW-LOGOS  [OSHW-LOGO-S]  161.29,45.85 270 bottom
LOGO101  SFE_LOGO_FLAME.1_INCH  [SFE_LOGO_FLAME_.1]  160.66,44.58 0 top
LOGO102  SFE_LOGO_NAME.1_INCH  [SFE_LOGO_NAME_.1]  157.48,52.32 270 bottom
LOGO103  OSHW-LOGOS  [OSHW-LOGO-S]  177.04,45.85 270 bottom
LOGO104  SFE_LOGO_FLAME.1_INCH  [SFE_LOGO_FLAME_.1]  176.4,44.58 0 top
LOGO105  SFE_LOGO_NAME.1_INCH  [SFE_LOGO_NAME_.1]  173.23,52.32 270 bottom
LOGO106  OSHW-LOGOS  [OSHW-LOGO-S]  192.79,45.85 270 bottom
LOGO107  SFE_LOGO_FLAME.1_INCH  [SFE_LOGO_FLAME_.1]  192.15,44.58 0 top
LOGO108  SFE_LOGO_NAME.1_INCH  [SFE_LOGO_NAME_.1]  188.98,52.32 270 bottom
LOGO109  OSHW-LOGOS  [OSHW-LOGO-S]  19.56,61.59 270 bottom
LOGO110  SFE_LOGO_FLAME.1_INCH  [SFE_LOGO_FLAME_.1]  18.92,60.33 0 top
LOGO111  SFE_LOGO_NAME.1_INCH  [SFE_LOGO_NAME_.1]  15.75,68.07 270 bottom
LOGO112  OSHW-LOGOS  [OSHW-LOGO-S]  35.31,61.59 270 bottom
LOGO113  SFE_LOGO_FLAME.1_INCH  [SFE_LOGO_FLAME_.1]  34.67,60.33 0 top
LOGO114  SFE_LOGO_NAME.1_INCH  [SFE_LOGO_NAME_.1]  31.5,68.07 270 bottom
LOGO115  OSHW-LOGOS  [OSHW-LOGO-S]  51.05,61.59 270 bottom
LOGO116  SFE_LOGO_FLAME.1_INCH  [SFE_LOGO_FLAME_.1]  50.42,60.33 0 top
LOGO117  SFE_LOGO_NAME.1_INCH  [SFE_LOGO_NAME_.1]  47.24,68.07 270 bottom
LOGO118  OSHW-LOGOS  [OSHW-LOGO-S]  66.8,61.59 270 bottom
LOGO119  SFE_LOGO_FLAME.1_INCH  [SFE_LOGO_FLAME_.1]  66.17,60.33 0 top
LOGO120  SFE_LOGO_NAME.1_INCH  [SFE_LOGO_NAME_.1]  62.99,68.07 270 bottom
LOGO121  OSHW-LOGOS  [OSHW-LOGO-S]  82.55,61.59 270 bottom
LOGO122  SFE_LOGO_FLAME.1_INCH  [SFE_LOGO_FLAME_.1]  81.92,60.33 0 top
LOGO123  SFE_LOGO_NAME.1_INCH  [SFE_LOGO_NAME_.1]  78.74,68.07 270 bottom
LOGO124  OSHW-LOGOS  [OSHW-LOGO-S]  98.3,61.59 270 bottom
LOGO125  SFE_LOGO_FLAME.1_INCH  [SFE_LOGO_FLAME_.1]  97.66,60.33 0 top
LOGO126  SFE_LOGO_NAME.1_INCH  [SFE_LOGO_NAME_.1]  94.49,68.07 270 bottom
LOGO127  OSHW-LOGOS  [OSHW-LOGO-S]  114.05,61.59 270 bottom
LOGO128  SFE_LOGO_FLAME.1_INCH  [SFE_LOGO_FLAME_.1]  113.41,60.33 0 top
LOGO129  SFE_LOGO_NAME.1_INCH  [SFE_LOGO_NAME_.1]  110.24,68.07 270 bottom
LOGO130  OSHW-LOGOS  [OSHW-LOGO-S]  129.79,61.59 270 bottom
LOGO131  SFE_LOGO_FLAME.1_INCH  [SFE_LOGO_FLAME_.1]  129.16,60.33 0 top
LOGO132  SFE_LOGO_NAME.1_INCH  [SFE_LOGO_NAME_.1]  125.98,68.07 270 bottom
LOGO133  OSHW-LOGOS  [OSHW-LOGO-S]  145.54,61.59 270 bottom
LOGO134  SFE_LOGO_FLAME.1_INCH  [SFE_LOGO_FLAME_.1]  144.91,60.33 0 top
LOGO135  SFE_LOGO_NAME.1_INCH  [SFE_LOGO_NAME_.1]  141.73,68.07 270 bottom
LOGO136  OSHW-LOGOS  [OSHW-LOGO-S]  161.29,61.59 270 bottom
LOGO137  SFE_LOGO_FLAME.1_INCH  [SFE_LOGO_FLAME_.1]  160.66,60.33 0 top
LOGO138  SFE_LOGO_NAME.1_INCH  [SFE_LOGO_NAME_.1]  157.48,68.07 270 bottom
LOGO139  OSHW-LOGOS  [OSHW-LOGO-S]  177.04,61.59 270 bottom
LOGO140  SFE_LOGO_FLAME.1_INCH  [SFE_LOGO_FLAME_.1]  176.4,60.33 0 top
LOGO141  SFE_LOGO_NAME.1_INCH  [SFE_LOGO_NAME_.1]  173.23,68.07 270 bottom
LOGO142  OSHW-LOGOS  [OSHW-LOGO-S]  192.79,61.59 270 bottom
LOGO143  SFE_LOGO_FLAME.1_INCH  [SFE_LOGO_FLAME_.1]  192.15,60.33 0 top
LOGO144  SFE_LOGO_NAME.1_INCH  [SFE_LOGO_NAME_.1]  188.98,68.07 270 bottom
LOGO145  OSHW-LOGOS  [OSHW-LOGO-S]  19.56,77.34 270 bottom
LOGO146  SFE_LOGO_FLAME.1_INCH  [SFE_LOGO_FLAME_.1]  18.92,76.07 0 top
LOGO147  SFE_LOGO_NAME.1_INCH  [SFE_LOGO_NAME_.1]  15.75,83.82 270 bottom
LOGO148  OSHW-LOGOS  [OSHW-LOGO-S]  35.31,77.34 270 bottom
LOGO149  SFE_LOGO_FLAME.1_INCH  [SFE_LOGO_FLAME_.1]  34.67,76.07 0 top
LOGO150  SFE_LOGO_NAME.1_INCH  [SFE_LOGO_NAME_.1]  31.5,83.82 270 bottom
LOGO151  OSHW-LOGOS  [OSHW-LOGO-S]  51.05,77.34 270 bottom
LOGO152  SFE_LOGO_FLAME.1_INCH  [SFE_LOGO_FLAME_.1]  50.42,76.07 0 top
LOGO153  SFE_LOGO_NAME.1_INCH  [SFE_LOGO_NAME_.1]  47.24,83.82 270 bottom
LOGO154  OSHW-LOGOS  [OSHW-LOGO-S]  66.8,77.34 270 bottom
LOGO155  SFE_LOGO_FLAME.1_INCH  [SFE_LOGO_FLAME_.1]  66.17,76.07 0 top
LOGO156  SFE_LOGO_NAME.1_INCH  [SFE_LOGO_NAME_.1]  62.99,83.82 270 bottom
LOGO157  OSHW-LOGOS  [OSHW-LOGO-S]  82.55,77.34 270 bottom
LOGO158  SFE_LOGO_FLAME.1_INCH  [SFE_LOGO_FLAME_.1]  81.92,76.07 0 top
LOGO159  SFE_LOGO_NAME.1_INCH  [SFE_LOGO_NAME_.1]  78.74,83.82 270 bottom
LOGO160  OSHW-LOGOS  [OSHW-LOGO-S]  98.3,77.34 270 bottom
LOGO161  SFE_LOGO_FLAME.1_INCH  [SFE_LOGO_FLAME_.1]  97.66,76.07 0 top
LOGO162  SFE_LOGO_NAME.1_INCH  [SFE_LOGO_NAME_.1]  94.49,83.82 270 bottom
LOGO163  OSHW-LOGOS  [OSHW-LOGO-S]  114.05,77.34 270 bottom
LOGO164  SFE_LOGO_FLAME.1_INCH  [SFE_LOGO_FLAME_.1]  113.41,76.07 0 top
LOGO165  SFE_LOGO_NAME.1_INCH  [SFE_LOGO_NAME_.1]  110.24,83.82 270 bottom
LOGO166  OSHW-LOGOS  [OSHW-LOGO-S]  129.79,77.34 270 bottom
LOGO167  SFE_LOGO_FLAME.1_INCH  [SFE_LOGO_FLAME_.1]  129.16,76.07 0 top
LOGO168  SFE_LOGO_NAME.1_INCH  [SFE_LOGO_NAME_.1]  125.98,83.82 270 bottom
LOGO169  OSHW-LOGOS  [OSHW-LOGO-S]  145.54,77.34 270 bottom
LOGO170  SFE_LOGO_FLAME.1_INCH  [SFE_LOGO_FLAME_.1]  144.91,76.07 0 top
LOGO171  SFE_LOGO_NAME.1_INCH  [SFE_LOGO_NAME_.1]  141.73,83.82 270 bottom
LOGO172  OSHW-LOGOS  [OSHW-LOGO-S]  161.29,77.34 270 bottom
LOGO173  SFE_LOGO_FLAME.1_INCH  [SFE_LOGO_FLAME_.1]  160.66,76.07 0 top
LOGO174  SFE_LOGO_NAME.1_INCH  [SFE_LOGO_NAME_.1]  157.48,83.82 270 bottom
LOGO175  OSHW-LOGOS  [OSHW-LOGO-S]  177.04,77.34 270 bottom
LOGO176  SFE_LOGO_FLAME.1_INCH  [SFE_LOGO_FLAME_.1]  176.4,76.07 0 top
LOGO177  SFE_LOGO_NAME.1_INCH  [SFE_LOGO_NAME_.1]  173.23,83.82 270 bottom
LOGO178  OSHW-LOGOS  [OSHW-LOGO-S]  192.79,77.34 270 bottom
LOGO179  SFE_LOGO_FLAME.1_INCH  [SFE_LOGO_FLAME_.1]  192.15,76.07 0 top
LOGO180  SFE_LOGO_NAME.1_INCH  [SFE_LOGO_NAME_.1]  188.98,83.82 270 bottom
LOGO181  OSHW-LOGOS  [OSHW-LOGO-S]  19.56,93.09 270 bottom
LOGO182  SFE_LOGO_FLAME.1_INCH  [SFE_LOGO_FLAME_.1]  18.92,91.82 0 top
LOGO183  SFE_LOGO_NAME.1_INCH  [SFE_LOGO_NAME_.1]  15.75,99.57 270 bottom
LOGO184  OSHW-LOGOS  [OSHW-LOGO-S]  35.31,93.09 270 bottom
LOGO185  SFE_LOGO_FLAME.1_INCH  [SFE_LOGO_FLAME_.1]  34.67,91.82 0 top
LOGO186  SFE_LOGO_NAME.1_INCH  [SFE_LOGO_NAME_.1]  31.5,99.57 270 bottom
LOGO187  OSHW-LOGOS  [OSHW-LOGO-S]  51.05,93.09 270 bottom
LOGO188  SFE_LOGO_FLAME.1_INCH  [SFE_LOGO_FLAME_.1]  50.42,91.82 0 top
LOGO189  SFE_LOGO_NAME.1_INCH  [SFE_LOGO_NAME_.1]  47.24,99.57 270 bottom
LOGO190  OSHW-LOGOS  [OSHW-LOGO-S]  66.8,93.09 270 bottom
LOGO191  SFE_LOGO_FLAME.1_INCH  [SFE_LOGO_FLAME_.1]  66.17,91.82 0 top
LOGO192  SFE_LOGO_NAME.1_INCH  [SFE_LOGO_NAME_.1]  62.99,99.57 270 bottom
LOGO193  OSHW-LOGOS  [OSHW-LOGO-S]  82.55,93.09 270 bottom
LOGO194  SFE_LOGO_FLAME.1_INCH  [SFE_LOGO_FLAME_.1]  81.92,91.82 0 top
LOGO195  SFE_LOGO_NAME.1_INCH  [SFE_LOGO_NAME_.1]  78.74,99.57 270 bottom
LOGO196  OSHW-LOGOS  [OSHW-LOGO-S]  98.3,93.09 270 bottom
LOGO197  SFE_LOGO_FLAME.1_INCH  [SFE_LOGO_FLAME_.1]  97.66,91.82 0 top
LOGO198  SFE_LOGO_NAME.1_INCH  [SFE_LOGO_NAME_.1]  94.49,99.57 270 bottom
LOGO199  OSHW-LOGOS  [OSHW-LOGO-S]  114.05,93.09 270 bottom
LOGO200  SFE_LOGO_FLAME.1_INCH  [SFE_LOGO_FLAME_.1]  113.41,91.82 0 top
LOGO201  SFE_LOGO_NAME.1_INCH  [SFE_LOGO_NAME_.1]  110.24,99.57 270 bottom
LOGO202  OSHW-LOGOS  [OSHW-LOGO-S]  129.79,93.09 270 bottom
LOGO203  SFE_LOGO_FLAME.1_INCH  [SFE_LOGO_FLAME_.1]  129.16,91.82 0 top
LOGO204  SFE_LOGO_NAME.1_INCH  [SFE_LOGO_NAME_.1]  125.98,99.57 270 bottom
LOGO205  OSHW-LOGOS  [OSHW-LOGO-S]  145.54,93.09 270 bottom
LOGO206  SFE_LOGO_FLAME.1_INCH  [SFE_LOGO_FLAME_.1]  144.91,91.82 0 top
LOGO207  SFE_LOGO_NAME.1_INCH  [SFE_LOGO_NAME_.1]  141.73,99.57 270 bottom
LOGO208  OSHW-LOGOS  [OSHW-LOGO-S]  161.29,93.09 270 bottom
LOGO209  SFE_LOGO_FLAME.1_INCH  [SFE_LOGO_FLAME_.1]  160.66,91.82 0 top
LOGO210  SFE_LOGO_NAME.1_INCH  [SFE_LOGO_NAME_.1]  157.48,99.57 270 bottom
LOGO211  OSHW-LOGOS  [OSHW-LOGO-S]  177.04,93.09 270 bottom
LOGO212  SFE_LOGO_FLAME.1_INCH  [SFE_LOGO_FLAME_.1]  176.4,91.82 0 top
LOGO213  SFE_LOGO_NAME.1_INCH  [SFE_LOGO_NAME_.1]  173.23,99.57 270 bottom
LOGO214  OSHW-LOGOS  [OSHW-LOGO-S]  192.79,93.09 270 bottom
LOGO215  SFE_LOGO_FLAME.1_INCH  [SFE_LOGO_FLAME_.1]  192.15,91.82 0 top
LOGO216  SFE_LOGO_NAME.1_INCH  [SFE_LOGO_NAME_.1]  188.98,99.57 270 bottom
R1  4.7K  [0603-RES]  11.94,18.29 270 top
R2  4.7K  [0603-RES]  11.94,10.67 90 top
R3  4.7K  [0603-RES]  27.69,18.29 270 top
R4  4.7K  [0603-RES]  27.69,10.67 90 top
R5  4.7K  [0603-RES]  43.43,18.29 270 top
R6  4.7K  [0603-RES]  43.43,10.67 90 top
R7  4.7K  [0603-RES]  59.18,18.29 270 top
R8  4.7K  [0603-RES]  59.18,10.67 90 top
R9  4.7K  [0603-RES]  74.93,18.29 270 top
R10  4.7K  [0603-RES]  74.93,10.67 90 top
R11  4.7K  [0603-RES]  90.68,18.29 270 top
R12  4.7K  [0603-RES]  90.68,10.67 90 top
R13  4.7K  [0603-RES]  106.43,18.29 270 top
R14  4.7K  [0603-RES]  106.43,10.67 90 top
R15  4.7K  [0603-RES]  122.17,18.29 270 top
R16  4.7K  [0603-RES]  122.17,10.67 90 top
R17  4.7K  [0603-RES]  137.92,18.29 270 top
R18  4.7K  [0603-RES]  137.92,10.67 90 top
R19  4.7K  [0603-RES]  153.67,18.29 270 top
R20  4.7K  [0603-RES]  153.67,10.67 90 top
R21  4.7K  [0603-RES]  169.42,18.29 270 top
R22  4.7K  [0603-RES]  169.42,10.67 90 top
R23  4.7K  [0603-RES]  185.17,18.29 270 top
R24  4.7K  [0603-RES]  185.17,10.67 90 top
R25  4.7K  [0603-RES]  11.94,34.04 270 top
R26  4.7K  [0603-RES]  11.94,26.42 90 top
R27  4.7K  [0603-RES]  27.69,34.04 270 top
R28  4.7K  [0603-RES]  27.69,26.42 90 top
R29  4.7K  [0603-RES]  43.43,34.04 270 top
R30  4.7K  [0603-RES]  43.43,26.42 90 top
R31  4.7K  [0603-RES]  59.18,34.04 270 top
R32  4.7K  [0603-RES]  59.18,26.42 90 top
R33  4.7K  [0603-RES]  74.93,34.04 270 top
R34  4.7K  [0603-RES]  74.93,26.42 90 top
R35  4.7K  [0603-RES]  90.68,34.04 270 top
R36  4.7K  [0603-RES]  90.68,26.42 90 top
R37  4.7K  [0603-RES]  106.43,34.04 270 top
R38  4.7K  [0603-RES]  106.43,26.42 90 top
R39  4.7K  [0603-RES]  122.17,34.04 270 top
R40  4.7K  [0603-RES]  122.17,26.42 90 top
R41  4.7K  [0603-RES]  137.92,34.04 270 top
R42  4.7K  [0603-RES]  137.92,26.42 90 top
R43  4.7K  [0603-RES]  153.67,34.04 270 top
R44  4.7K  [0603-RES]  153.67,26.42 90 top
R45  4.7K  [0603-RES]  169.42,34.04 270 top
R46  4.7K  [0603-RES]  169.42,26.42 90 top
R47  4.7K  [0603-RES]  185.17,34.04 270 top
R48  4.7K  [0603-RES]  185.17,26.42 90 top
R49  4.7K  [0603-RES]  11.94,49.78 270 top
R50  4.7K  [0603-RES]  11.94,42.16 90 top
R51  4.7K  [0603-RES]  27.69,49.78 270 top
R52  4.7K  [0603-RES]  27.69,42.16 90 top
R53  4.7K  [0603-RES]  43.43,49.78 270 top
R54  4.7K  [0603-RES]  43.43,42.16 90 top
R55  4.7K  [0603-RES]  59.18,49.78 270 top
R56  4.7K  [0603-RES]  59.18,42.16 90 top
R57  4.7K  [0603-RES]  74.93,49.78 270 top
R58  4.7K  [0603-RES]  74.93,42.16 90 top
R59  4.7K  [0603-RES]  90.68,49.78 270 top
R60  4.7K  [0603-RES]  90.68,42.16 90 top
R61  4.7K  [0603-RES]  106.43,49.78 270 top
R62  4.7K  [0603-RES]  106.43,42.16 90 top
R63  4.7K  [0603-RES]  122.17,49.78 270 top
R64  4.7K  [0603-RES]  122.17,42.16 90 top
R65  4.7K  [0603-RES]  137.92,49.78 270 top
R66  4.7K  [0603-RES]  137.92,42.16 90 top
R67  4.7K  [0603-RES]  153.67,49.78 270 top
R68  4.7K  [0603-RES]  153.67,42.16 90 top
R69  4.7K  [0603-RES]  169.42,49.78 270 top
R70  4.7K  [0603-RES]  169.42,42.16 90 top
R71  4.7K  [0603-RES]  185.17,49.78 270 top
R72  4.7K  [0603-RES]  185.17,42.16 90 top
R73  4.7K  [0603-RES]  11.94,65.53 270 top
R74  4.7K  [0603-RES]  11.94,57.91 90 top
R75  4.7K  [0603-RES]  27.69,65.53 270 top
R76  4.7K  [0603-RES]  27.69,57.91 90 top
R77  4.7K  [0603-RES]  43.43,65.53 270 top
R78  4.7K  [0603-RES]  43.43,57.91 90 top
R79  4.7K  [0603-RES]  59.18,65.53 270 top
R80  4.7K  [0603-RES]  59.18,57.91 90 top
R81  4.7K  [0603-RES]  74.93,65.53 270 top
R82  4.7K  [0603-RES]  74.93,57.91 90 top
R83  4.7K  [0603-RES]  90.68,65.53 270 top
R84  4.7K  [0603-RES]  90.68,57.91 90 top
R85  4.7K  [0603-RES]  106.43,65.53 270 top
R86  4.7K  [0603-RES]  106.43,57.91 90 top
R87  4.7K  [0603-RES]  122.17,65.53 270 top
R88  4.7K  [0603-RES]  122.17,57.91 90 top
R89  4.7K  [0603-RES]  137.92,65.53 270 top
R90  4.7K  [0603-RES]  137.92,57.91 90 top
R91  4.7K  [0603-RES]  153.67,65.53 270 top
R92  4.7K  [0603-RES]  153.67,57.91 90 top
R93  4.7K  [0603-RES]  169.42,65.53 270 top
R94  4.7K  [0603-RES]  169.42,57.91 90 top
R95  4.7K  [0603-RES]  185.17,65.53 270 top
R96  4.7K  [0603-RES]  185.17,57.91 90 top
R97  4.7K  [0603-RES]  11.94,81.28 270 top
R98  4.7K  [0603-RES]  11.94,73.66 90 top
R99  4.7K  [0603-RES]  27.69,81.28 270 top
R100  4.7K  [0603-RES]  27.69,73.66 90 top
R101  4.7K  [0603-RES]  43.43,81.28 270 top
R102  4.7K  [0603-RES]  43.43,73.66 90 top
R103  4.7K  [0603-RES]  59.18,81.28 270 top
R104  4.7K  [0603-RES]  59.18,73.66 90 top
R105  4.7K  [0603-RES]  74.93,81.28 270 top
R106  4.7K  [0603-RES]  74.93,73.66 90 top
R107  4.7K  [0603-RES]  90.68,81.28 270 top
R108  4.7K  [0603-RES]  90.68,73.66 90 top
R109  4.7K  [0603-RES]  106.43,81.28 270 top
R110  4.7K  [0603-RES]  106.43,73.66 90 top
R111  4.7K  [0603-RES]  122.17,81.28 270 top
R112  4.7K  [0603-RES]  122.17,73.66 90 top
R113  4.7K  [0603-RES]  137.92,81.28 270 top
R114  4.7K  [0603-RES]  137.92,73.66 90 top
R115  4.7K  [0603-RES]  153.67,81.28 270 top
R116  4.7K  [0603-RES]  153.67,73.66 90 top
R117  4.7K  [0603-RES]  169.42,81.28 270 top
R118  4.7K  [0603-RES]  169.42,73.66 90 top
R119  4.7K  [0603-RES]  185.17,81.28 270 top
R120  4.7K  [0603-RES]  185.17,73.66 90 top
R121  4.7K  [0603-RES]  11.94,97.03 270 top
R122  4.7K  [0603-RES]  11.94,89.41 90 top
R123  4.7K  [0603-RES]  27.69,97.03 270 top
R124  4.7K  [0603-RES]  27.69,89.41 90 top
R125  4.7K  [0603-RES]  43.43,97.03 270 top
R126  4.7K  [0603-RES]  43.43,89.41 90 top
R127  4.7K  [0603-RES]  59.18,97.03 270 top
R128  4.7K  [0603-RES]  59.18,89.41 90 top
R129  4.7K  [0603-RES]  74.93,97.03 270 top
R130  4.7K  [0603-RES]  74.93,89.41 90 top
R131  4.7K  [0603-RES]  90.68,97.03 270 top
R132  4.7K  [0603-RES]  90.68,89.41 90 top
R133  4.7K  [0603-RES]  106.43,97.03 270 top
R134  4.7K  [0603-RES]  106.43,89.41 90 top
R135  4.7K  [0603-RES]  122.17,97.03 270 top
R136  4.7K  [0603-RES]  122.17,89.41 90 top
R137  4.7K  [0603-RES]  137.92,97.03 270 top
R138  4.7K  [0603-RES]  137.92,89.41 90 top
R139  4.7K  [0603-RES]  153.67,97.03 270 top
R140  4.7K  [0603-RES]  153.67,89.41 90 top
R141  4.7K  [0603-RES]  169.42,97.03 270 top
R142  4.7K  [0603-RES]  169.42,89.41 90 top
R143  4.7K  [0603-RES]  185.17,97.03 270 top
R144  4.7K  [0603-RES]  185.17,89.41 90 top
SJ1  [SJ_3_PASTE1&2&3]  11.94,14.48 90 top
SJ2  [SJ_3_PASTE1&2&3]  27.69,14.48 90 top
SJ3  [SJ_3_PASTE1&2&3]  43.43,14.48 90 top
SJ4  [SJ_3_PASTE1&2&3]  59.18,14.48 90 top
SJ5  [SJ_3_PASTE1&2&3]  74.93,14.48 90 top
SJ6  [SJ_3_PASTE1&2&3]  90.68,14.48 90 top
SJ7  [SJ_3_PASTE1&2&3]  106.43,14.48 90 top
SJ8  [SJ_3_PASTE1&2&3]  122.17,14.48 90 top
SJ9  [SJ_3_PASTE1&2&3]  137.92,14.48 90 top
SJ10  [SJ_3_PASTE1&2&3]  153.67,14.48 90 top
SJ11  [SJ_3_PASTE1&2&3]  169.42,14.48 90 top
SJ12  [SJ_3_PASTE1&2&3]  185.17,14.48 90 top
SJ13  [SJ_3_PASTE1&2&3]  11.94,30.23 90 top
SJ14  [SJ_3_PASTE1&2&3]  27.69,30.23 90 top
SJ15  [SJ_3_PASTE1&2&3]  43.43,30.23 90 top
SJ16  [SJ_3_PASTE1&2&3]  59.18,30.23 90 top
SJ17  [SJ_3_PASTE1&2&3]  74.93,30.23 90 top
SJ18  [SJ_3_PASTE1&2&3]  90.68,30.23 90 top
SJ19  [SJ_3_PASTE1&2&3]  106.43,30.23 90 top
SJ20  [SJ_3_PASTE1&2&3]  122.17,30.23 90 top
SJ21  [SJ_3_PASTE1&2&3]  137.92,30.23 90 top
SJ22  [SJ_3_PASTE1&2&3]  153.67,30.23 90 top
SJ23  [SJ_3_PASTE1&2&3]  169.42,30.23 90 top
SJ24  [SJ_3_PASTE1&2&3]  185.17,30.23 90 top
SJ25  [SJ_3_PASTE1&2&3]  11.94,45.97 90 top
SJ26  [SJ_3_PASTE1&2&3]  27.69,45.97 90 top
SJ27  [SJ_3_PASTE1&2&3]  43.43,45.97 90 top
SJ28  [SJ_3_PASTE1&2&3]  59.18,45.97 90 top
SJ29  [SJ_3_PASTE1&2&3]  74.93,45.97 90 top
SJ30  [SJ_3_PASTE1&2&3]  90.68,45.97 90 top
SJ31  [SJ_3_PASTE1&2&3]  106.43,45.97 90 top
SJ32  [SJ_3_PASTE1&2&3]  122.17,45.97 90 top
SJ33  [SJ_3_PASTE1&2&3]  137.92,45.97 90 top
SJ34  [SJ_3_PASTE1&2&3]  153.67,45.97 90 top
SJ35  [SJ_3_PASTE1&2&3]  169.42,45.97 90 top
SJ36  [SJ_3_PASTE1&2&3]  185.17,45.97 90 top
SJ37  [SJ_3_PASTE1&2&3]  11.94,61.72 90 top
SJ38  [SJ_3_PASTE1&2&3]  27.69,61.72 90 top
SJ39  [SJ_3_PASTE1&2&3]  43.43,61.72 90 top
SJ40  [SJ_3_PASTE1&2&3]  59.18,61.72 90 top
SJ41  [SJ_3_PASTE1&2&3]  74.93,61.72 90 top
SJ42  [SJ_3_PASTE1&2&3]  90.68,61.72 90 top
SJ43  [SJ_3_PASTE1&2&3]  106.43,61.72 90 top
SJ44  [SJ_3_PASTE1&2&3]  122.17,61.72 90 top
SJ45  [SJ_3_PASTE1&2&3]  137.92,61.72 90 top
SJ46  [SJ_3_PASTE1&2&3]  153.67,61.72 90 top
SJ47  [SJ_3_PASTE1&2&3]  169.42,61.72 90 top
SJ48  [SJ_3_PASTE1&2&3]  185.17,61.72 90 top
SJ49  [SJ_3_PASTE1&2&3]  11.94,77.47 90 top
SJ50  [SJ_3_PASTE1&2&3]  27.69,77.47 90 top
SJ51  [SJ_3_PASTE1&2&3]  43.43,77.47 90 top
SJ52  [SJ_3_PASTE1&2&3]  59.18,77.47 90 top
SJ53  [SJ_3_PASTE1&2&3]  74.93,77.47 90 top
SJ54  [SJ_3_PASTE1&2&3]  90.68,77.47 90 top
SJ55  [SJ_3_PASTE1&2&3]  106.43,77.47 90 top
SJ56  [SJ_3_PASTE1&2&3]  122.17,77.47 90 top
SJ57  [SJ_3_PASTE1&2&3]  137.92,77.47 90 top
SJ58  [SJ_3_PASTE1&2&3]  153.67,77.47 90 top
SJ59  [SJ_3_PASTE1&2&3]  169.42,77.47 90 top
SJ60  [SJ_3_PASTE1&2&3]  185.17,77.47 90 top
SJ61  [SJ_3_PASTE1&2&3]  11.94,93.22 90 top
SJ62  [SJ_3_PASTE1&2&3]  27.69,93.22 90 top
SJ63  [SJ_3_PASTE1&2&3]  43.43,93.22 90 top
SJ64  [SJ_3_PASTE1&2&3]  59.18,93.22 90 top
SJ65  [SJ_3_PASTE1&2&3]  74.93,93.22 90 top
SJ66  [SJ_3_PASTE1&2&3]  90.68,93.22 90 top
SJ67  [SJ_3_PASTE1&2&3]  106.43,93.22 90 top
SJ68  [SJ_3_PASTE1&2&3]  122.17,93.22 90 top
SJ69  [SJ_3_PASTE1&2&3]  137.92,93.22 90 top
SJ70  [SJ_3_PASTE1&2&3]  153.67,93.22 90 top
SJ71  [SJ_3_PASTE1&2&3]  169.42,93.22 90 top
SJ72  [SJ_3_PASTE1&2&3]  185.17,93.22 90 top
STANDOFF1  STAND-OFF  [STAND-OFF]  19.56,19.56 90 top
STANDOFF2  STAND-OFF  [STAND-OFF]  19.56,9.4 90 top
STANDOFF3  STAND-OFF  [STAND-OFF]  35.31,9.4 90 top
STANDOFF4  STAND-OFF  [STAND-OFF]  35.31,19.56 90 top
STANDOFF5  STAND-OFF  [STAND-OFF]  51.05,9.4 90 top
STANDOFF6  STAND-OFF  [STAND-OFF]  51.05,19.56 90 top
STANDOFF7  STAND-OFF  [STAND-OFF]  66.8,9.4 90 top
STANDOFF8  STAND-OFF  [STAND-OFF]  66.8,19.56 90 top
STANDOFF9  STAND-OFF  [STAND-OFF]  82.55,9.4 90 top
STANDOFF10  STAND-OFF  [STAND-OFF]  82.55,19.56 90 top
STANDOFF11  STAND-OFF  [STAND-OFF]  98.3,9.4 90 top
STANDOFF12  STAND-OFF  [STAND-OFF]  98.3,19.56 90 top
STANDOFF13  STAND-OFF  [STAND-OFF]  114.05,9.4 90 top
STANDOFF14  STAND-OFF  [STAND-OFF]  114.05,19.56 90 top
STANDOFF15  STAND-OFF  [STAND-OFF]  129.79,9.4 90 top
STANDOFF16  STAND-OFF  [STAND-OFF]  129.79,19.56 90 top
STANDOFF17  STAND-OFF  [STAND-OFF]  145.54,9.4 90 top
STANDOFF18  STAND-OFF  [STAND-OFF]  145.54,19.56 90 top
STANDOFF19  STAND-OFF  [STAND-OFF]  161.29,9.4 90 top
STANDOFF20  STAND-OFF  [STAND-OFF]  161.29,19.56 90 top
STANDOFF21  STAND-OFF  [STAND-OFF]  177.04,9.4 90 top
STANDOFF22  STAND-OFF  [STAND-OFF]  177.04,19.56 90 top
STANDOFF23  STAND-OFF  [STAND-OFF]  192.79,9.4 90 top
STANDOFF24  STAND-OFF  [STAND-OFF]  192.79,19.56 90 top
STANDOFF25  STAND-OFF  [STAND-OFF]  19.56,25.15 90 top
STANDOFF26  STAND-OFF  [STAND-OFF]  19.56,35.31 90 top
STANDOFF27  STAND-OFF  [STAND-OFF]  35.31,25.15 90 top
STANDOFF28  STAND-OFF  [STAND-OFF]  35.31,35.31 90 top
STANDOFF29  STAND-OFF  [STAND-OFF]  51.05,25.15 90 top
STANDOFF30  STAND-OFF  [STAND-OFF]  51.05,35.31 90 top
STANDOFF31  STAND-OFF  [STAND-OFF]  66.8,25.15 90 top
STANDOFF32  STAND-OFF  [STAND-OFF]  66.8,35.31 90 top
STANDOFF33  STAND-OFF  [STAND-OFF]  82.55,25.15 90 top
STANDOFF34  STAND-OFF  [STAND-OFF]  82.55,35.31 90 top
STANDOFF35  STAND-OFF  [STAND-OFF]  98.3,25.15 90 top
STANDOFF36  STAND-OFF  [STAND-OFF]  98.3,35.31 90 top
STANDOFF37  STAND-OFF  [STAND-OFF]  114.05,25.15 90 top
STANDOFF38  STAND-OFF  [STAND-OFF]  114.05,35.31 90 top
STANDOFF39  STAND-OFF  [STAND-OFF]  129.79,25.15 90 top
STANDOFF40  STAND-OFF  [STAND-OFF]  129.79,35.31 90 top
STANDOFF41  STAND-OFF  [STAND-OFF]  145.54,25.15 90 top
STANDOFF42  STAND-OFF  [STAND-OFF]  145.54,35.31 90 top
STANDOFF43  STAND-OFF  [STAND-OFF]  161.29,25.15 90 top
STANDOFF44  STAND-OFF  [STAND-OFF]  161.29,35.31 90 top
STANDOFF45  STAND-OFF  [STAND-OFF]  177.04,25.15 90 top
STANDOFF46  STAND-OFF  [STAND-OFF]  177.04,35.31 90 top
STANDOFF47  STAND-OFF  [STAND-OFF]  192.79,25.15 90 top
STANDOFF48  STAND-OFF  [STAND-OFF]  192.79,35.31 90 top
STANDOFF49  STAND-OFF  [STAND-OFF]  19.56,40.89 90 top
STANDOFF50  STAND-OFF  [STAND-OFF]  19.56,51.05 90 top
STANDOFF51  STAND-OFF  [STAND-OFF]  35.31,40.89 90 top
STANDOFF52  STAND-OFF  [STAND-OFF]  35.31,51.05 90 top
STANDOFF53  STAND-OFF  [STAND-OFF]  51.05,40.89 90 top
STANDOFF54  STAND-OFF  [STAND-OFF]  51.05,51.05 90 top
STANDOFF55  STAND-OFF  [STAND-OFF]  66.8,40.89 90 top
STANDOFF56  STAND-OFF  [STAND-OFF]  66.8,51.05 90 top
STANDOFF57  STAND-OFF  [STAND-OFF]  82.55,40.89 90 top
STANDOFF58  STAND-OFF  [STAND-OFF]  82.55,51.05 90 top
STANDOFF59  STAND-OFF  [STAND-OFF]  98.3,40.89 90 top
STANDOFF60  STAND-OFF  [STAND-OFF]  98.3,51.05 90 top
STANDOFF61  STAND-OFF  [STAND-OFF]  114.05,40.89 90 top
STANDOFF62  STAND-OFF  [STAND-OFF]  114.05,51.05 90 top
STANDOFF63  STAND-OFF  [STAND-OFF]  129.79,40.89 90 top
STANDOFF64  STAND-OFF  [STAND-OFF]  129.79,51.05 90 top
STANDOFF65  STAND-OFF  [STAND-OFF]  145.54,40.89 90 top
STANDOFF66  STAND-OFF  [STAND-OFF]  145.54,51.05 90 top
STANDOFF67  STAND-OFF  [STAND-OFF]  161.29,40.89 90 top
STANDOFF68  STAND-OFF  [STAND-OFF]  161.29,51.05 90 top
STANDOFF69  STAND-OFF  [STAND-OFF]  177.04,40.89 90 top
STANDOFF70  STAND-OFF  [STAND-OFF]  177.04,51.05 90 top
STANDOFF71  STAND-OFF  [STAND-OFF]  192.79,40.89 90 top
STANDOFF72  STAND-OFF  [STAND-OFF]  192.79,51.05 90 top
STANDOFF73  STAND-OFF  [STAND-OFF]  19.56,56.64 90 top
STANDOFF74  STAND-OFF  [STAND-OFF]  19.56,66.8 90 top
STANDOFF75  STAND-OFF  [STAND-OFF]  35.31,56.64 90 top
STANDOFF76  STAND-OFF  [STAND-OFF]  35.31,66.8 90 top
STANDOFF77  STAND-OFF  [STAND-OFF]  51.05,56.64 90 top
STANDOFF78  STAND-OFF  [STAND-OFF]  51.05,66.8 90 top
STANDOFF79  STAND-OFF  [STAND-OFF]  66.8,56.64 90 top
STANDOFF80  STAND-OFF  [STAND-OFF]  66.8,66.8 90 top
STANDOFF81  STAND-OFF  [STAND-OFF]  82.55,56.64 90 top
STANDOFF82  STAND-OFF  [STAND-OFF]  82.55,66.8 90 top
STANDOFF83  STAND-OFF  [STAND-OFF]  98.3,56.64 90 top
STANDOFF84  STAND-OFF  [STAND-OFF]  98.3,66.8 90 top
STANDOFF85  STAND-OFF  [STAND-OFF]  114.05,56.64 90 top
STANDOFF86  STAND-OFF  [STAND-OFF]  114.05,66.8 90 top
STANDOFF87  STAND-OFF  [STAND-OFF]  129.79,56.64 90 top
STANDOFF88  STAND-OFF  [STAND-OFF]  129.79,66.8 90 top
STANDOFF89  STAND-OFF  [STAND-OFF]  145.54,56.64 90 top
STANDOFF90  STAND-OFF  [STAND-OFF]  145.54,66.8 90 top
STANDOFF91  STAND-OFF  [STAND-OFF]  161.29,56.64 90 top
STANDOFF92  STAND-OFF  [STAND-OFF]  161.29,66.8 90 top
STANDOFF93  STAND-OFF  [STAND-OFF]  177.04,56.64 90 top
STANDOFF94  STAND-OFF  [STAND-OFF]  177.04,66.8 90 top
STANDOFF95  STAND-OFF  [STAND-OFF]  192.79,56.64 90 top
STANDOFF96  STAND-OFF  [STAND-OFF]  192.79,66.8 90 top
STANDOFF97  STAND-OFF  [STAND-OFF]  19.56,72.39 90 top
STANDOFF98  STAND-OFF  [STAND-OFF]  19.56,82.55 90 top
STANDOFF99  STAND-OFF  [STAND-OFF]  35.31,72.39 90 top
STANDOFF100  STAND-OFF  [STAND-OFF]  35.31,82.55 90 top
STANDOFF101  STAND-OFF  [STAND-OFF]  51.05,72.39 90 top
STANDOFF102  STAND-OFF  [STAND-OFF]  51.05,82.55 90 top
STANDOFF103  STAND-OFF  [STAND-OFF]  66.8,72.39 90 top
STANDOFF104  STAND-OFF  [STAND-OFF]  66.8,82.55 90 top
STANDOFF105  STAND-OFF  [STAND-OFF]  82.55,72.39 90 top
STANDOFF106  STAND-OFF  [STAND-OFF]  82.55,82.55 90 top
STANDOFF107  STAND-OFF  [STAND-OFF]  98.3,72.39 90 top
STANDOFF108  STAND-OFF  [STAND-OFF]  98.3,82.55 90 top
STANDOFF109  STAND-OFF  [STAND-OFF]  114.05,72.39 90 top
STANDOFF110  STAND-OFF  [STAND-OFF]  114.05,82.55 90 top
STANDOFF111  STAND-OFF  [STAND-OFF]  129.79,72.39 90 top
STANDOFF112  STAND-OFF  [STAND-OFF]  129.79,82.55 90 top
STANDOFF113  STAND-OFF  [STAND-OFF]  145.54,72.39 90 top
STANDOFF114  STAND-OFF  [STAND-OFF]  145.54,82.55 90 top
STANDOFF115  STAND-OFF  [STAND-OFF]  161.29,72.39 90 top
STANDOFF116  STAND-OFF  [STAND-OFF]  161.29,82.55 90 top
STANDOFF117  STAND-OFF  [STAND-OFF]  177.04,72.39 90 top
STANDOFF118  STAND-OFF  [STAND-OFF]  177.04,82.55 90 top
STANDOFF119  STAND-OFF  [STAND-OFF]  192.79,72.39 90 top
STANDOFF120  STAND-OFF  [STAND-OFF]  192.79,82.55 90 top
STANDOFF121  STAND-OFF  [STAND-OFF]  19.56,88.14 90 top
STANDOFF122  STAND-OFF  [STAND-OFF]  19.56,98.3 90 top
STANDOFF123  STAND-OFF  [STAND-OFF]  35.31,88.14 90 top
STANDOFF124  STAND-OFF  [STAND-OFF]  35.31,98.3 90 top
STANDOFF125  STAND-OFF  [STAND-OFF]  51.05,88.14 90 top
STANDOFF126  STAND-OFF  [STAND-OFF]  51.05,98.3 90 top
STANDOFF127  STAND-OFF  [STAND-OFF]  66.8,88.14 90 top
STANDOFF128  STAND-OFF  [STAND-OFF]  66.8,98.3 90 top
STANDOFF129  STAND-OFF  [STAND-OFF]  82.55,88.14 90 top
STANDOFF130  STAND-OFF  [STAND-OFF]  82.55,98.3 90 top
STANDOFF131  STAND-OFF  [STAND-OFF]  98.3,88.14 90 top
STANDOFF132  STAND-OFF  [STAND-OFF]  98.3,98.3 90 top
STANDOFF133  STAND-OFF  [STAND-OFF]  114.05,88.14 90 top
STANDOFF134  STAND-OFF  [STAND-OFF]  114.05,98.3 90 top
STANDOFF135  STAND-OFF  [STAND-OFF]  129.79,88.14 90 top
STANDOFF136  STAND-OFF  [STAND-OFF]  129.79,98.3 90 top
STANDOFF137  STAND-OFF  [STAND-OFF]  145.54,88.14 90 top
STANDOFF138  STAND-OFF  [STAND-OFF]  145.54,98.3 90 top
STANDOFF139  STAND-OFF  [STAND-OFF]  161.29,88.14 90 top
STANDOFF140  STAND-OFF  [STAND-OFF]  161.29,98.3 90 top
STANDOFF141  STAND-OFF  [STAND-OFF]  177.04,88.14 90 top
STANDOFF142  STAND-OFF  [STAND-OFF]  177.04,98.3 90 top
STANDOFF143  STAND-OFF  [STAND-OFF]  192.79,88.14 90 top
STANDOFF144  STAND-OFF  [STAND-OFF]  192.79,98.3 90 top
U1  SI7021  [SI7021]  17.02,14.48 90 top
U2  SI7021  [SI7021]  32.77,14.48 90 top
U3  SI7021  [SI7021]  48.51,14.48 90 top
U4  SI7021  [SI7021]  64.26,14.48 90 top
U5  SI7021  [SI7021]  80.01,14.48 90 top
U6  SI7021  [SI7021]  95.76,14.48 90 top
U7  SI7021  [SI7021]  111.51,14.48 90 top
U8  SI7021  [SI7021]  127.25,14.48 90 top
U9  SI7021  [SI7021]  143,14.48 90 top
U10  SI7021  [SI7021]  158.75,14.48 90 top
U11  SI7021  [SI7021]  174.5,14.48 90 top
U12  SI7021  [SI7021]  190.25,14.48 90 top
U13  SI7021  [SI7021]  17.02,30.23 90 top
U14  SI7021  [SI7021]  32.77,30.23 90 top
U15  SI7021  [SI7021]  48.51,30.23 90 top
U16  SI7021  [SI7021]  64.26,30.23 90 top
U17  SI7021  [SI7021]  80.01,30.23 90 top
U18  SI7021  [SI7021]  95.76,30.23 90 top
U19  SI7021  [SI7021]  111.51,30.23 90 top
U20  SI7021  [SI7021]  127.25,30.23 90 top
U21  SI7021  [SI7021]  143,30.23 90 top
U22  SI7021  [SI7021]  158.75,30.23 90 top
U23  SI7021  [SI7021]  174.5,30.23 90 top
U24  SI7021  [SI7021]  190.25,30.23 90 top
U25  SI7021  [SI7021]  17.02,45.97 90 top
U26  SI7021  [SI7021]  32.77,45.97 90 top
U27  SI7021  [SI7021]  48.51,45.97 90 top
U28  SI7021  [SI7021]  64.26,45.97 90 top
U29  SI7021  [SI7021]  80.01,45.97 90 top
U30  SI7021  [SI7021]  95.76,45.97 90 top
U31  SI7021  [SI7021]  111.51,45.97 90 top
U32  SI7021  [SI7021]  127.25,45.97 90 top
U33  SI7021  [SI7021]  143,45.97 90 top
U34  SI7021  [SI7021]  158.75,45.97 90 top
U35  SI7021  [SI7021]  174.5,45.97 90 top
U36  SI7021  [SI7021]  190.25,45.97 90 top
U37  SI7021  [SI7021]  17.02,61.72 90 top
U38  SI7021  [SI7021]  32.77,61.72 90 top
U39  SI7021  [SI7021]  48.51,61.72 90 top